# Altium PCB PCB1.PcbDoc
Units mil, origin at the board's own origin, x right, y up, seen from the top; angles counter-clockwise.
Board outline 4765 x 4565 mil, 2 copper layers (Top Layer, Bottom Layer); 18 components, 28 nets, 88 pads, 8 vias.
Unrouted connection lines stored in the file: 1.
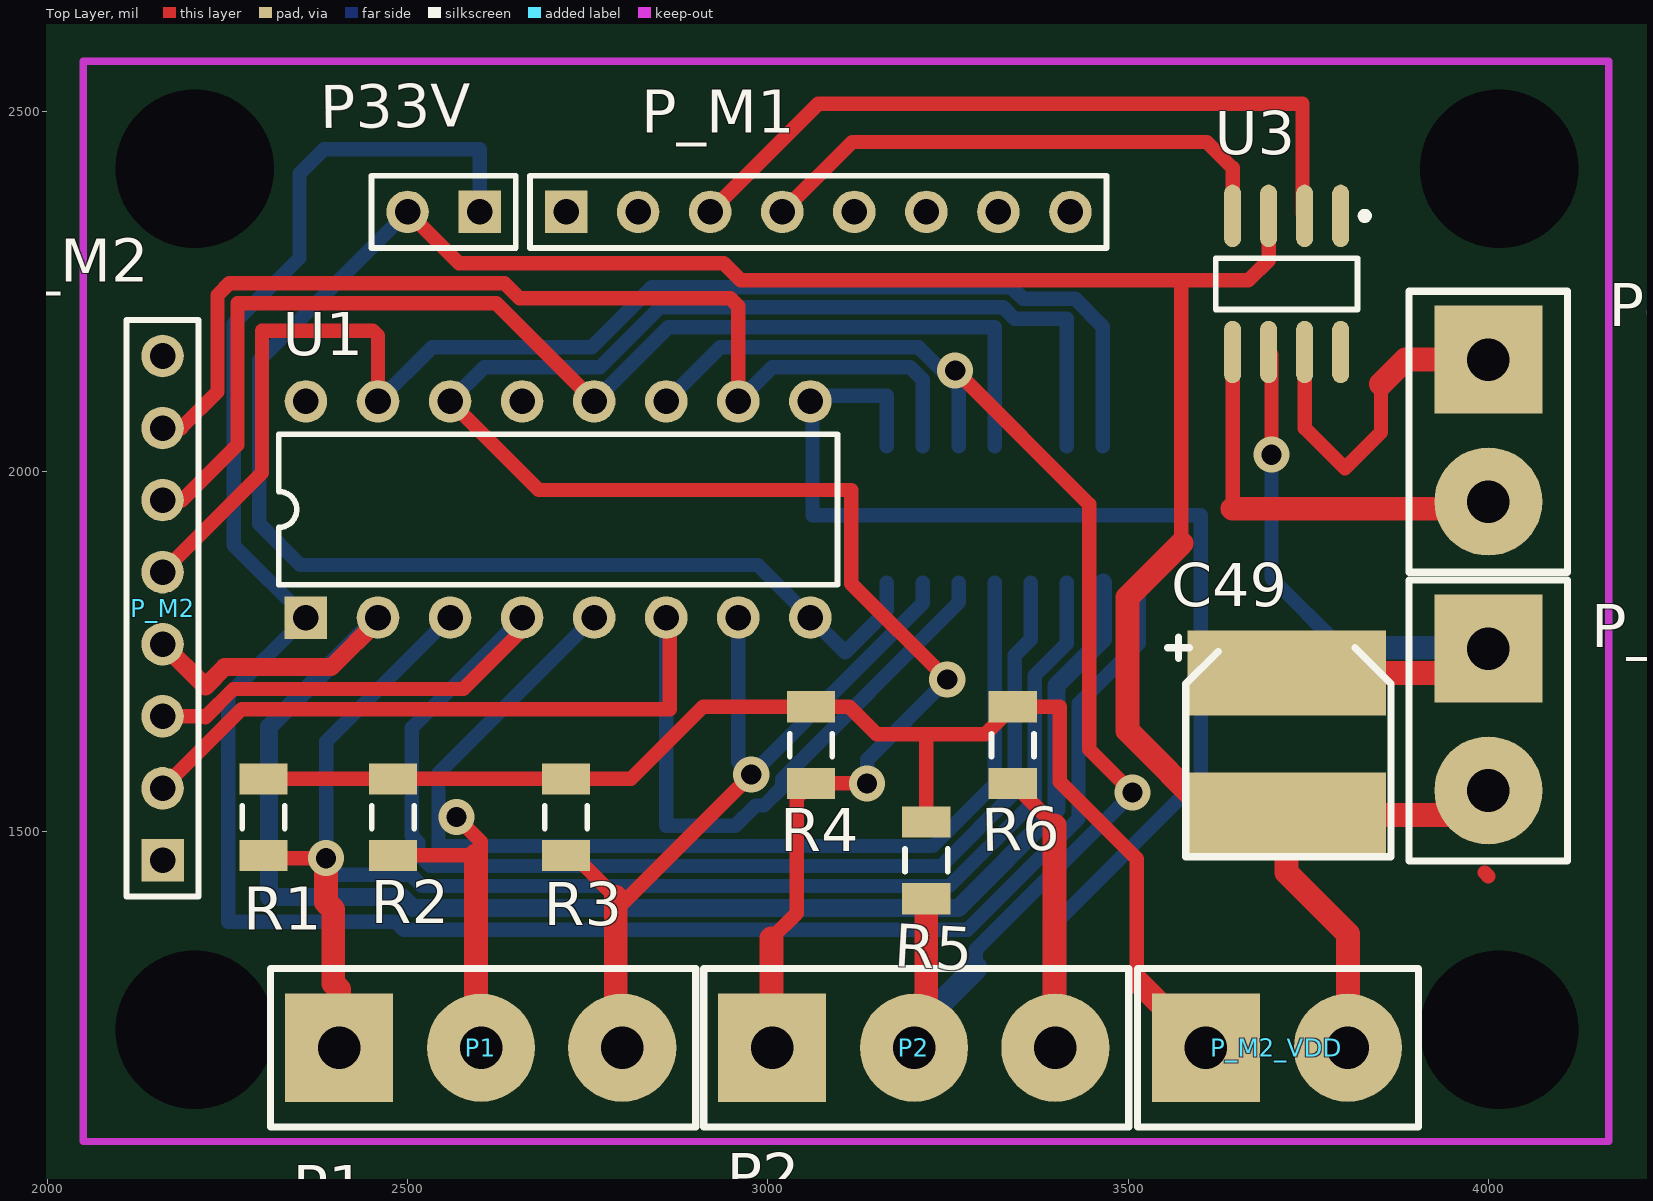
[diagram p0: Top Layer view]
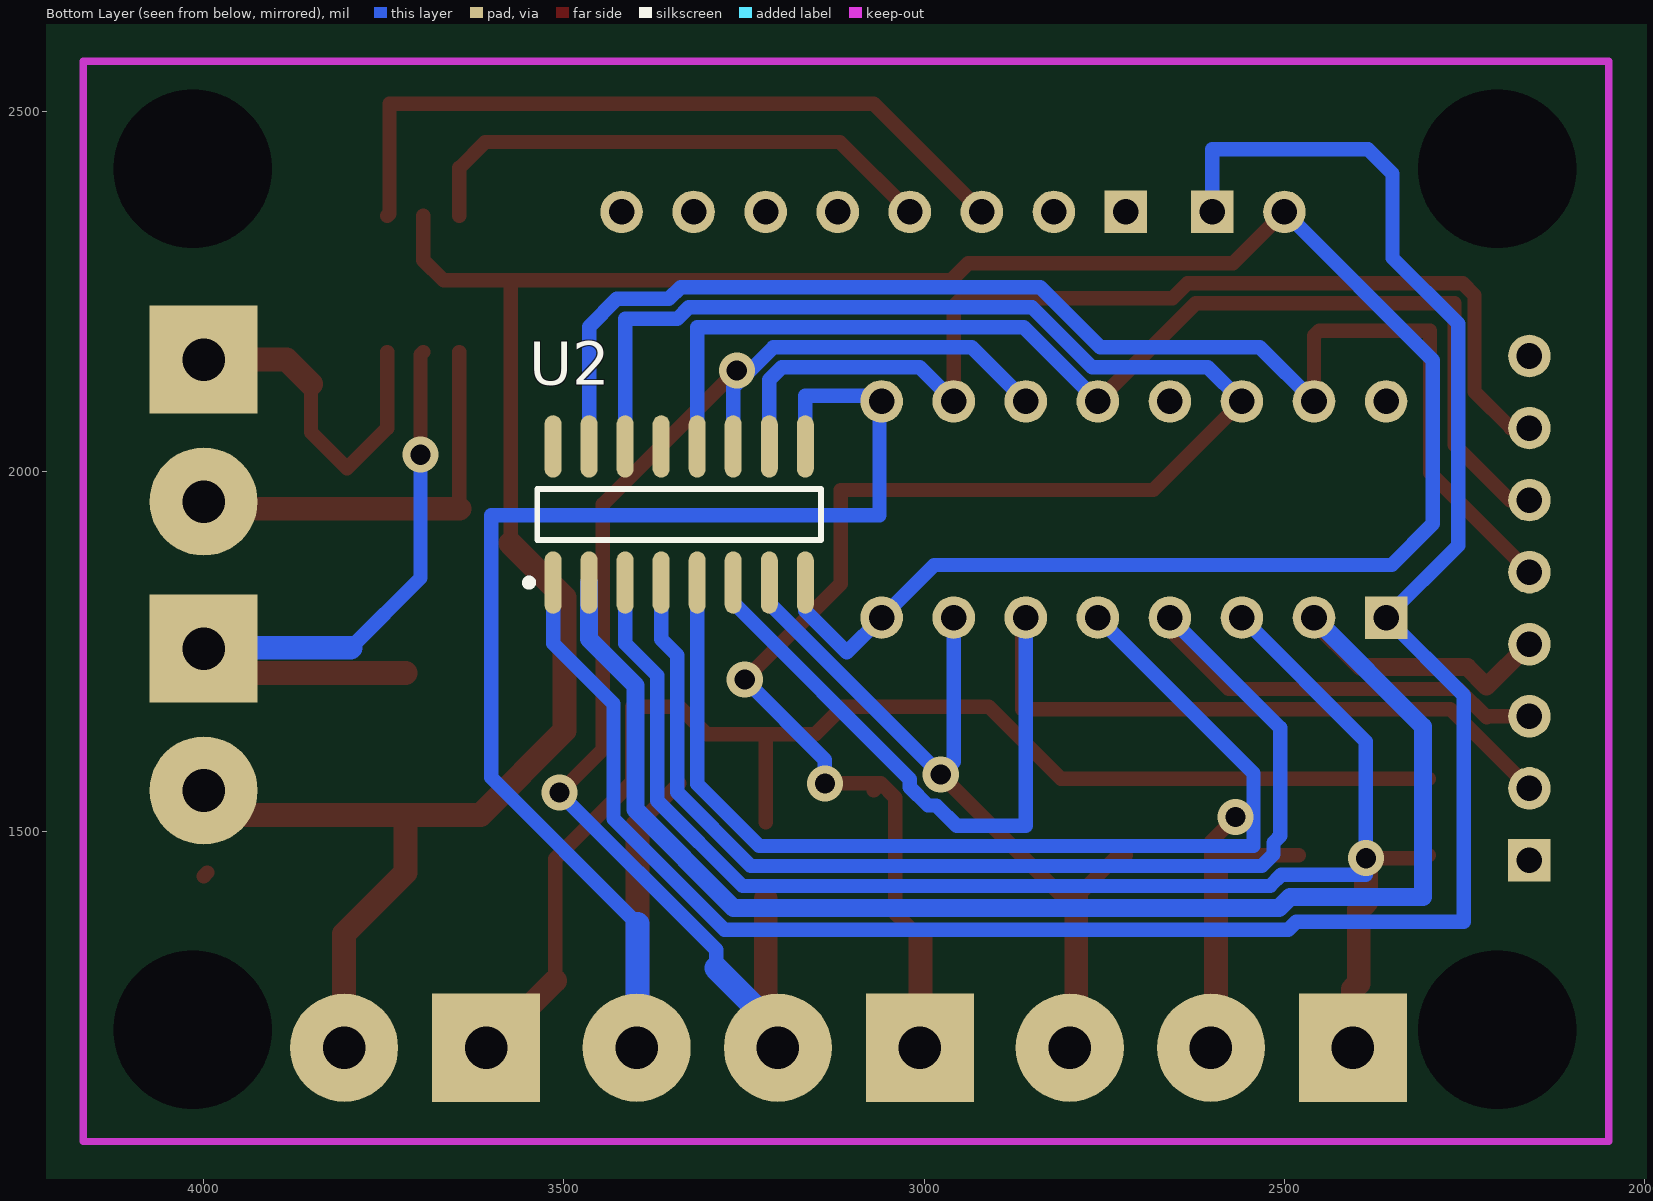
[diagram p1: Bottom Layer view, seen from below]

## Layer stack, top to bottom
Top Layer: signal copper 1.4
Dielectric: dielectric 12.6, FR-4, Dk 4.8
Bottom Layer: signal copper 1.4

## Board outline
1285,5360 1285,795 6050,795 6050,5345 6035,5360

## Design rules (kind name [scope] priority, off if disabled: settings)
AssemblyTestPointUsage [All] p1 off:
AssemblyTestpoint [All] p1 off: testpointundercomponent=TRUE minsize=40 maxsize=100 preferedsize=60 minholesize=0 maxholesize=40 preferedholesize=32 testpointgrid=1 usegrid=TRUE gridtolerance=0.01 allowsidetop=TRUE allowsidebottom=TRUE
Clearance [All] p1: gap=7.8
ComponentClearance [All] p1: gap=1 collisioncheckmode=3 verticalgap=1 showdistances=FALSE
FabricationTestPointUsage [All] p1 off: valid=0 allowmultiple=FALSE
FabricationTestpoint [All] p1 off: side=3 testpointundercomponent=TRUE minsize=40 maxsize=100 preferedsize=60 minholesize=0 maxholesize=40 preferedholesize=32 testpointgrid=1 allowsidetop=TRUE allowsidebottom=TRUE usegrid=TRUE gridtolerance=0.01
HoleSize [All] p1: absolutevalues=TRUE maxlimit=200 minlimit=1 maxpercent=80.000 minpercent=20.000
MinimumSolderMaskSliver [All] p1: minsoldermaskwidth=7
PolygonConnect [All] p1: connectstyle=Relief reliefconductorwidth=10 reliefentries=4 polygonreliefangle="90 Angle"
RoomDefinition Sheet1 [InComponentClass('Sheet1')] p1: confinementstyle=ConfineIn formatcopy=TRUE lockcomponents=FALSE outline 1893,884 4815,884 4815,2674 1893,2674
RoutingVias [All] p1: holewidth=28 width=50 viastyle="Through Hole" minholewidth=28 minwidth=50 maxholewidth=28 maxwidth=50
SMDNeckDown [All] p1: percent=1000.000
SilkToSilkClearance [All] p1 off: silktosilkclearance=10
SilkscreenOverComponentPads [All] p1: minsilkscreentomaskgap=10
SolderMaskExpansion [All] p1: expansion=4
Width [All] p1: maxlimit=78.74 minlimit=10 preferedwidth=23.62
19 further rules are at their usual default settings.

## Components (designator, comment, footprint, x,y, rotation, side; value= is the part's Value field where it differs from the comment)
C49 "47uF" NSOALUMB 3720,1720 r270 top
P1 "Header 3" BIG3 2420,1200 r180 top
P2 "Header 3" BIG3 3021,1200 r180 top
P33V "Header 2" HDR1X2 2600,2360 r180 top
P4427 "Header 2" BIG2 4000,2140 r90 top
P_4427_VDD "Header 2" BIG2 4000,1739 r90 top
P_M1 "Header 8" HDR1X8 2720,2360 r0 top
P_M2 "Header 8" HDR1X8 2160,1460 r90 top
P_M2_VDD "Header 2" BIG2 3623,1200 r180 top
R1 "10K" RESC3216L 2300,1520 r270 top
R2 "10K" RESC3216L 2480,1520 r270 top
R3 "10K" RESC3216L 2720,1520 r270 top
R4 "10K" RESC3216L 3060,1620 r270 top
R5 "10K" RESC3216L 3220,1460 r270 top
R6 "10K" RESC3216L 3340,1620 r270 top
U1 "MC14050BCP" 648-08 2709,1947 r0 top
U2 "MC14050BD" 751B-05_N 3340,1940 r90 bottom
U3 "TC4427AEOA" SOIC-OA8_N 3720,2260 r270 top

## Footprints (in the part's own frame and the unit in brackets; to place one, negate y for a bottom-side part, rotate by r counter-clockwise, add the part's x,y. Pads: shape width x height; smd on the part's side, far side on the other; paste and mask are expansions set on the pad)
648-08 [mm] "DIP; 16 Leads; Row Spacing 7.62 mm; Pitch 2.54 mm"
  rect 1.5x1.5 hole 0.9: 1(-8.89,-3.81)
  round 1.5 hole 0.9: 2(-6.35,-3.81) 3(-3.81,-3.81) 4(-1.27,-3.81) 5(1.27,-3.81) 6(3.81,-3.81) 7(6.35,-3.81) 8(8.89,-3.81) 9(8.89,3.81) 10(6.35,3.81) 11(3.81,3.81) 12(1.27,3.81) 13(-1.27,3.81) 14(-3.81,3.81) 15(-6.35,3.81) 16(-8.89,3.81)
  silkscreen extent -9.85,-2.65 9.85,2.65
751B-05_N [mm] "SOIC, 16-Leads, Body 9.9x3.9mm, Pitch 1.27mm, IPC Medium Density"
  oval 2.2x0.6 smd: 1(-2.4,4.445) 2(-2.4,3.175) 3(-2.4,1.905) 4(-2.4,0.635) 5(-2.4,-0.635) 6(-2.4,-1.905) 7(-2.4,-3.175) 8(-2.4,-4.445) 9(2.4,-4.445) 10(2.4,-3.175) 11(2.4,-1.905) 12(2.4,-0.635) 13(2.4,0.635) 14(2.4,1.905) 15(2.4,3.175) 16(2.4,4.445)
  silkscreen extent -2.52,-5 0.9,5.42, body extent -2,-5 2,5, height 1.75
BIG2 [mil]
  rect 150x150 hole 59.06: 1(15,0)
  round 150 hole 59.06: 2(-182,0)
  silkscreen extent -280,-110 110,110
BIG3 [mil]
  rect 150x150 hole 59.06: 1(15,0)
  round 150 hole 59.06: 2(-182,0) 3(-378,0)
  silkscreen extent -480,-110 110,110
HDR1X2 [mm] "Connector; Header; 2 Position"
  rect 1.5x1.5 hole 0.9: 1(0,0)
  round 1.5 hole 0.9: 2(2.54,0)
  silkscreen extent -1.27,-1.27 3.81,1.27
HDR1X8 [mm] "Connector; Header; 8 Position"
  rect 1.5x1.5 hole 0.9: 1(0,0)
  round 1.5 hole 0.9: 2(2.54,0) 3(5.08,0) 4(7.62,0) 5(10.16,0) 6(12.7,0) 7(15.24,0) 8(17.78,0)
  silkscreen extent -1.27,-1.27 19.05,1.27
NSOALUMB [mm]
  rect 3x7 smd: 1(0,0) 2(5,0)
  silkscreen extent -1.27,-4.19 6.48,3.68
RESC3216L [mm] "Chip Resistor, Body 3.1x1.6mm, IPC High Density"
  rect 1.1x1.7 smd: 1(-1.35,0) 2(1.35,0)
  silkscreen extent -0.4,-0.75 0.4,0.75, body extent -1.68,-0.87 1.68,0.87, height 2.54
SOIC-OA8_N [mm] "SOIC, 8-Leads, Body 4.9x3.9mm, Pitch 1.27mm, IPC Medium Density"
  oval 2.2x0.6 smd: 1(-2.4,1.905) 2(-2.4,0.635) 3(-2.4,-0.635) 4(-2.4,-1.905) 5(2.4,-1.905) 6(2.4,-0.635) 7(2.4,0.635) 8(2.4,1.905)
  silkscreen extent -2.52,-2.5 0.9,2.88, body extent -2,-2.5 2,2.5, height 1.75

## Part data
C49: library part "Cap Pol1", "Polarized Capacitor (Radial)"
P1 P2: "Header, 3-Pin"
P33V P4427 P_4427_VDD P_M2_VDD: "Header, 2-Pin"
P_M1 P_M2: "Header, 8-Pin"
R1 R2 R3 R4 R5 R6: library part "Res Semi", "Semiconductor Resistor"
U1 U2: "Hex Non-Inverting Buffer"
U3: "1.5A Dual High-Speed Power MOSFET Driver, Non-Inverting, Industrial Temperature"

## Free pads (board coordinates)
  round 60 hole 220: 0(2205,1225) 0(2205,2420) 0(4015,1225) 0(4015,2420)

## Via types
v1: diameter 50, hole 28, Top Layer to Bottom Layer, 8 vias

## Nets (pads, with @x,y where several pads share a name; then routed paths per layer and width w, separated by ;. In a path a pad name is that pad's centre, name@x,y a point inside that pad or via, vN(x,y) a via of type N, cw(c..) or ccw(c..) an arc to the next point about the centre after c; other vN are vias at no path point)
GND: C49.2 P33V.2 P_4427_VDD.2 P_M2_VDD.2 U1.8 U2.8 U3.3 | length 4446.5
  Top Layer w20: P33V.2 2571.4,2288.6 2938.72,2288.6 2962.32,2265 3574,2265 ; 3574,1900 3574,2265 ; U3.3 3695,2293 3667,2265 3574,2265 ; 3994.85,1443.15 4000,1438
  Top Layer w33: 3574,1900 3499,1825 3499,1640 3615.85,1523.15 C49.2 ; P_M2_VDD.2 3805,1358 3720,1443 C49.2 ; P_4427_VDD.2 3966.15,1523.15 C49.2
  Bottom Layer w20: P33V.2@2480.47,2340.47 P33V.2 2294,2154 2294,1927 2351,1870 2986,1870 U1.8 3107.34,1748.66 3165,1806.32 U2.8
NetC49_1: C49.1 P_4427_VDD.1 U3.6 | length 978.7
  Top Layer w20: U3.6 3699,2161.51 v1(3699,2023) ; P_4427_VDD.1@3980,1774 P_4427_VDD.1
  Top Layer w33: C49.1 3966,1720 P_4427_VDD.1
  Bottom Layer w20: v1(3699,2023) 3699,1852 3796,1755
  Bottom Layer w33: 3796,1755 P_4427_VDD.1@4000,1755
NetP1_1: P1.1 R1.2 U1.3 U2.3 | length 2147.4
  Top Layer w20: R1.2 2303.85,1463 v1(2387,1463)
  Top Layer w33: v1(2387,1463) 2387,1401.75 2397,1391.75 2397,1289.25 2405,1281.25 P1.1
  Bottom Layer w20: U1.3 2387,1625 v1(2387,1463) 2387,1440 2504.37,1440 2519.97,1424.4 3252.03,1424.4 3370.6,1542.97 3370.6,1716.6 3415,1761 U2.3
NetP1_2: P1.2 R2.2 U1.5 U2.5 | length 1977.5
  Top Layer w20: R2.2 2595.15,1466.85 ; v1(2568,1520) 2602,1486 2602,1460
  Top Layer w33: 2595.15,1466.85 2595.15,1206.85 P1.2
  Bottom Layer w20: v1(2568,1520) v1@2543,1520 ; U1.5 2543,1581 v1@2543,1520 ; U2.5 3315,1566 3229,1480 2543,1480 v1@2543,1520
NetP1_3: P1.3 R3.2 U1.7 U2.7 | length 1149.4
  Top Layer w20: R3.2 2731.15,1466.85 2789,1409 ; 2798,1400 v1(2977,1579)
  Top Layer w33: 2789,1409 2789,1209 P1.3
  Bottom Layer w20: U1.7 2959,1597 v1(2977,1579) 3215,1817 U2.7
NetP2_1: P2.1 R4.2 U1.14 U2.14 | length 2714.5
  Top Layer w20: U1.14 2682,1974 3116,1974 3116,1844 v1(3249,1711) ; 3005,1351.85 3040,1386.85 3040,1546.85 R4.2 ; R4.2@3069.85,1557 R4.2 ; v1(3137.85,1566.85) R4.2
  Top Layer w33: P2.1@3005,1200 3005,1351.85
  Bottom Layer w20: U1.14 2606.33,2144.33 2767.01,2144.33 2850.41,2227.73 3326.52,2227.73 3342.8,2211.44 3415,2211.44 3415,2149 ; v1(3137.85,1566.85) 3137.85,1599.85 v1(3249,1711) ; U2.14 3415,2149 ; 3415,2172 3415,2149
NetP2_2: P2.2 R5.2 U1.11 U2.11 | length 1954.1
  Top Layer w20: U1.11 U1.11@2874,2097 ; P2.2@3202,1200 3200,1202 P2.2@3220,1222 ; v1(3260,2140) 3446,1954 3446,1614 v1(3506,1554)
  Top Layer w33: P2.2@3220,1222 R5.2
  Bottom Layer w20: U1.11 2934.13,2172.13 3209.19,2172.13 v1@3250.66,2130.66 ; P2.2@3202,1200 P2.2@3202,1224 ; v1(3260,2140) v1@3250.66,2130.66 ; U2.11 3265,2116.32 v1@3250.66,2130.66 ; 3288.65,1310.65 3288.65,1336 3506,1553.35 v1(3506,1554)
  Bottom Layer w33: P2.2@3202,1224 3288.65,1310.65
NetP2_3: P2.3 R6.2 U1.9 U2.9 | length 2092
  Top Layer w20: R6.2 3398,1508.85
  Top Layer w33: P2.3@3398,1200 3398,1508.85
  Bottom Layer w20: U2.9 3165,2105 3067,2105 U1.9 3062,2094 3062,1939 3601,1939 3601,1575 3398,1372
  Bottom Layer w33: P2.3@3398,1200 3398,1372
NetP4427_1: P4427.1 U3.7 | length 485.5
  Top Layer w20: U3.7 3745,2060 3801,2004 3851,2054 3851,2121
  Top Layer w33: 3851,2121 3885,2155 P4427.1
NetP4427_2: P4427.2 U3.5 | length 576.7
  Top Layer w20: 3645,1948 U3.5 ; P4427.2@3990,1948 P4427.2
  Top Layer w33: 3645,1948 P4427.2@3990,1948
NetP_M1_1: P_M1.1
NetP_M1_2: P_M1.2
NetP_M1_3: P_M1.3 U3.2 | length 1040.9
  Top Layer w20: P_M1.3 3070,2510 3742,2510 3742,2357.49 U3.2
NetP_M1_4: P_M1.4 U3.4 | length 746.6
  Top Layer w20: P_M1.4 3117,2457 3609,2457 3645,2421 U3.4
NetP_M1_5: P_M1.5
NetP_M1_6: P_M1.6
NetP_M1_7: P_M1.7
NetP_M1_8: P_M1.8
NetP_M2_1: P_M2.1
NetP_M2_2: P_M2.2 U1.6 U2.6 | length 1736.3
  Top Layer w20: P_M2.2 2270,1670 2864,1670 2864,1792 U1.6
  Bottom Layer w20: U1.6 2859,1508 2955,1508 2983.2,1536.2 2994.73,1536.2 3019.8,1561.27 3019.8,1572.8 3265,1818 U2.6
NetP_M2_3: P_M2.3 U1.4 U2.4 | length 2147.3
  Top Layer w20: P_M2.3 2218,1660 2219.34,1658.66 2258.48,1697.8 2577.4,1697.8 2667.8,1788.2 U1.4
  Bottom Layer w20: U1.4 2505.8,1643.8 2505.8,1494 2515.2,1484.6 2515.2,1468.48 2531.48,1452.2 3240.52,1452.2 3342.8,1554.48 3342.8,1744.48 3365,1766.68 U2.4
NetP_M2_4: P_M2.4 U1.2 U2.2 | length 2314.5
  Top Layer w25: P_M2.4 2160.85,1760 2219.34,1701.51 2245.93,1728.1 2394.1,1728.1 2461,1795 U1.2
  Bottom Layer w25: U1.2 2308,1646 2308,1409 2492.52,1409 2507.42,1394.1 3264.58,1394.1 3400.9,1530.42 3400.9,1702.9 3465,1767 U2.2
NetP_M2_5: P_M2.5 U1.15 U2.15 | length 1907.7
  Top Layer w20: P_M2.5 2298,1998 2298,2195 2452,2195 2459,2188 U1.15
  Bottom Layer w20: U1.15 2534.13,2172.13 2755.5,2172.13 2838.9,2255.53 3338.03,2255.53 3354.32,2239.24 3426.52,2239.24 3465,2200.76 U2.15
NetP_M2_6: P_M2.6 U1.12 U2.12 | length 1647.3
  Top Layer w20: P_M2.6 2187,1960 2264,2037 2264,2233 2623,2233 U1.12
  Bottom Layer w20: U1.12 2861.93,2199.93 3315,2199.93 U2.12
NetP_M2_7: P_M2.7 U1.10 U2.10 | length 1481.1
  Top Layer w20: P_M2.7 2185.68,2060 2236.2,2110.52 2236.2,2244.52 2252.48,2260.8 2634.52,2260.8 2655.32,2240 2948,2240 2959,2229 U1.10
  Bottom Layer w20: U1.10 3006.33,2144.33 3197.67,2144.33 3215,2127 U2.10
NetP_M2_8: P_M2.8
NetP_M2_VDD_1: P_M2_VDD.1 R1.1 R2.1 R3.1 R4.1 R5.1 R6.1 | length 1856
  Top Layer w20: R1.1 R2.1 R3.1 2810.15,1573.15 2910.15,1673.15 R4.1 3112.85,1673.15 3151,1635 3220,1635 ; R5.1 3220,1635 ; 3512,1293 3512,1462.4 3405.15,1569.25 3405.15,1673.15 R6.1 3301.85,1635 3220,1635
  Top Layer w33: 3512,1293 P_M2_VDD.1@3605,1200
VDD: P33V.1 U1.1 U2.1 | length 3123.9
  Bottom Layer w20: P33V.1 2600,2447 2384,2447 2350,2413 2350,2296 2259,2205 2259,1897 U1.1 2251,1689 2251,1375 2483.67,1375 2494.87,1363.8 3277.13,1363.8 3431.2,1517.87 3431.2,1677.2 3515,1761 U2.1
pads on no net: U1.13 U1.16 U2.13 U2.16 U3.1 U3.8

## Keep-outs
Keep-Out Layer:
  lines w10: 4166,1070 2050,1070 2050,2569 4167,2569 4167,1070